# EAGLE board elysium_v0_4 (EAGLE 6.5.0)
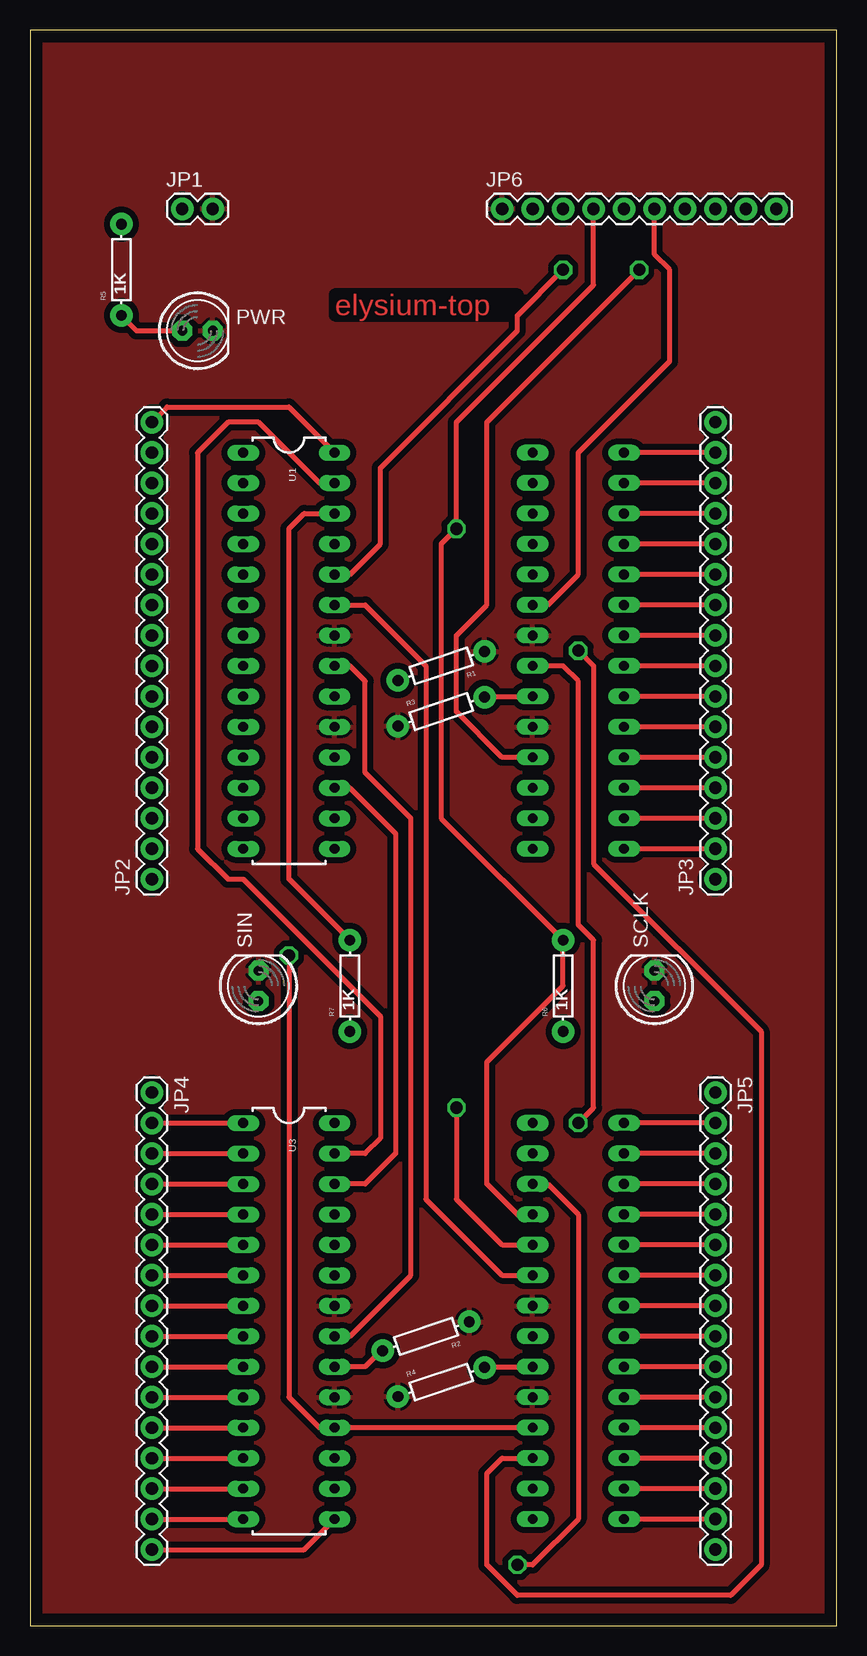
[diagram p0: board, top side]
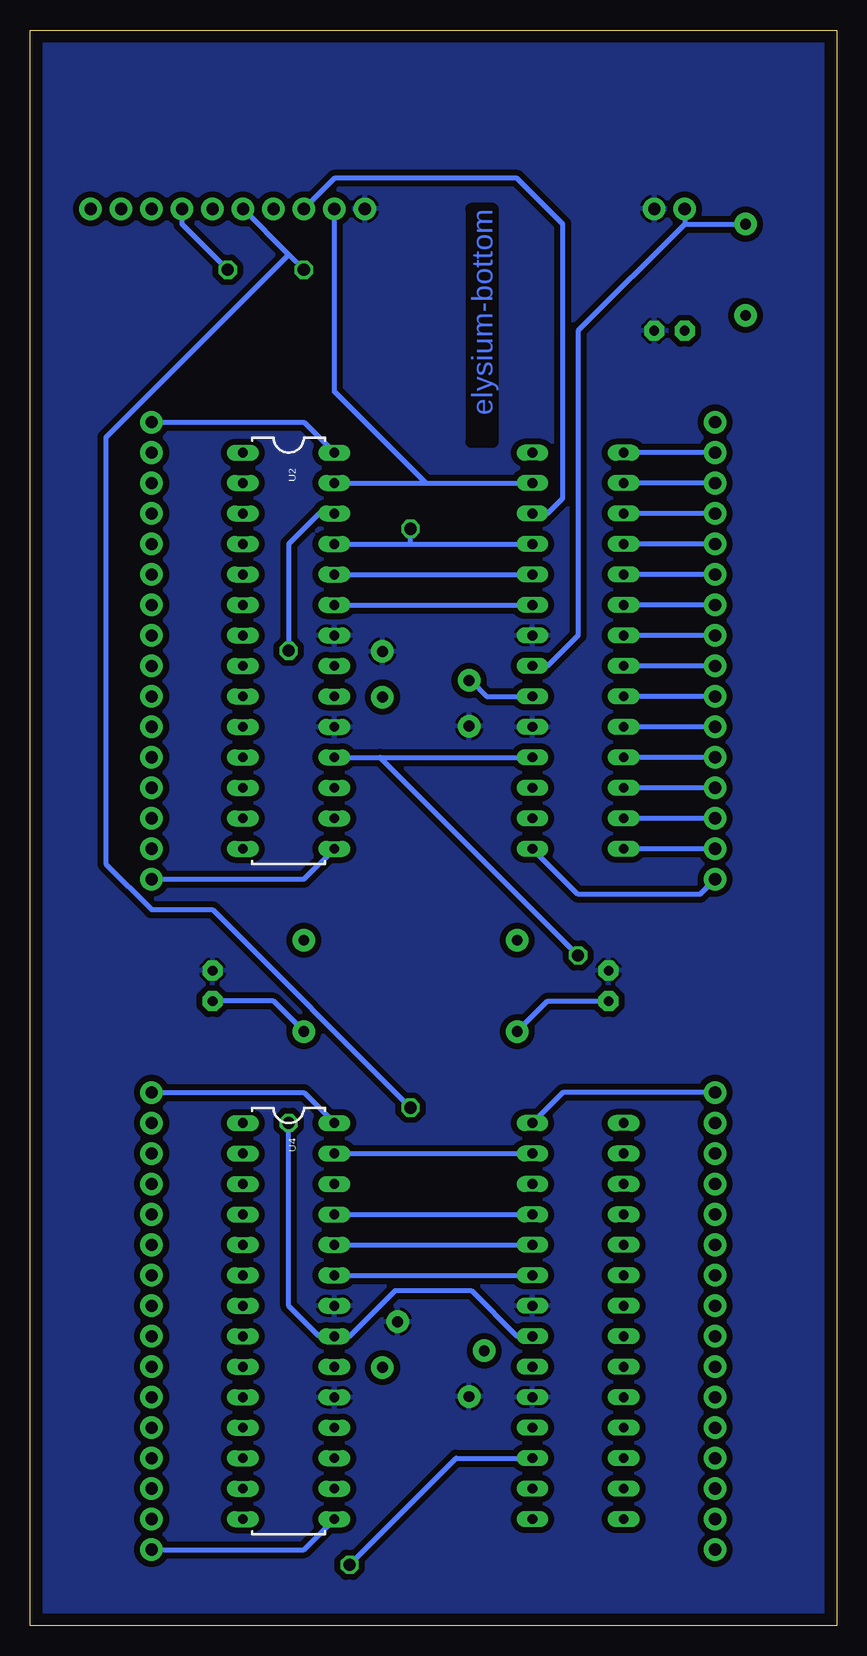
[diagram p1: board, bottom side, seen from below]

Size 67.29 x 133.02 mm. Coordinates in mm from the lower left corner, seen from the top.
Outline: 0,0 67.29,0 67.29,133.02 0,133.02 0,0
Copper layers (1*16): Top 0.035mm / dielectric 1.5mm / Bottom 0.035mm
Design rules "default *": minimum track width 16mil, minimum drill 20mil, track to track 20mil, track to pad 20mil, pad to pad 20mil, via to via 20mil, smd to smd 8mil, copper to edge 40mil, drill to drill 8mil, minimum pad ring 10mil, minimum via ring 8mil, stop-mask expansion 10mil, vias tented up to drill 40mil, thermal gap 10mil

## Footprints (pad centres in the part's own frame; a part is rotated, then mirrored left to right if it is on the bottom)
1X02 = drill 1.016 pad 1.88: 1 0,0; 2 2.54,0
1X16 = drill 1.016 pad 1.88: 1 0,0; 2 2.54,0; 3 5.08,0; 4 7.62,0; 5 10.16,0; 6 12.7,0; 7 15.24,0; 8 17.78,0; 9 20.32,0; 10 22.86,0; 11 25.4,0; 12 27.94,0; 13 30.48,0; 14 33.02,0; 15 35.56,0; 16 38.1,0
1X10 = drill 1.016 pad 1.88: 1 0,0; 2 2.54,0; 3 5.08,0; 4 7.62,0; 5 10.16,0; 6 12.7,0; 7 15.24,0; 8 17.78,0; 9 20.32,0; 10 22.86,0
LED5MM = drill 0.813 pad 1.676 octagon: A -1.27,0; K 1.27,0
AXIAL-0.3EZ = drill 0.9 pad 1.88: P$1 -3.81,0; P$2 3.81,0
DIL28-3 = drill 0.813 long: 1 -16.51,-3.81; 2 -13.97,-3.81; 3 -11.43,-3.81; 4 -8.89,-3.81; 5 -6.35,-3.81; 6 -3.81,-3.81; 7 -1.27,-3.81; 8 1.27,-3.81; 9 3.81,-3.81; 10 6.35,-3.81; 11 8.89,-3.81; 12 11.43,-3.81; 13 13.97,-3.81; 14 16.51,-3.81; 15 16.51,3.81; 16 13.97,3.81; 17 11.43,3.81; 18 8.89,3.81; 19 6.35,3.81; 20 3.81,3.81; 21 1.27,3.81; 22 -1.27,3.81; 23 -3.81,3.81; 24 -6.35,3.81; 25 -8.89,3.81; 26 -11.43,3.81; 27 -13.97,3.81; 28 -16.51,3.81

## Placement (x,y rotation side)
JP1  M02PTH  [1X02]  12.7,118.11 0 top
JP2  M16PTH  [1X16]  10.16,62.23 90 top
JP3  M16PTH  [1X16]  57.15,62.23 90 top
JP4  M16PTH  [1X16]  10.16,44.45 270 top
JP5  M16PTH  [1X16]  57.15,44.45 270 top
JP6  M10"  [1X10]  39.37,118.11 0 top
PWR  [LED5MM]  13.97,107.95 0 top
R1  [AXIAL-0.3EZ]  34.29,80.01 198.5 top
R2  [AXIAL-0.3EZ]  33.02,24.13 198.5 top
R3  [AXIAL-0.3EZ]  34.29,76.2 18.5 top
R4  [AXIAL-0.3EZ]  34.29,20.32 18.5 top
R5  1K  [AXIAL-0.3EZ]  7.62,113.03 90 top
R6  1K  [AXIAL-0.3EZ]  44.45,53.34 90 top
R7  1K  [AXIAL-0.3EZ]  26.67,53.34 90 top
SCLK  [LED5MM]  52.07,53.34 90 top
SIN  [LED5MM]  19.05,53.34 90 top
U1  TLC5940-NT  [DIL28-3]  21.59,81.28 270 top
U2  TLC5940-NT  [DIL28-3]  45.72,81.28 270 bottom
U3  TLC5940-NT  [DIL28-3]  21.59,25.4 270 top
U4  TLC5940-NT  [DIL28-3]  45.72,25.4 270 bottom

## Library data of the parts
JP1-JP6 = SparkFun-Connectors
PWR SCLK SIN = adafruit
R1-R7 = SparkFun-Resistors
U1-U4 = SparkFun-DigitalIC

## Nets
BLANK: JP6.6 U1.23 U2.23 U3.23 U4.23
GND: JP1.2 JP6.1 PWR.K R1.P$1 R2.P$1 R3.P$1 R4.P$1 SCLK.K SIN.K U1.19 U1.22 U2.19 U2.22 U3.19 U3.22 U4.19 U4.22
GSCLK: JP6.7 U1.18 U2.18 U3.18 U4.18
N$1: JP2.16 U1.28
N$2: JP2.15 U1.1
N$3: JP2.14 U1.2
N$4: JP2.13 U1.3
N$5: JP2.12 U1.4
N$6: JP2.11 U1.5
N$7: JP2.10 U1.6
N$8: JP2.9 U1.7
N$9: JP2.8 U1.8
N$10: JP2.7 U1.9
N$11: JP2.6 U1.10
N$12: JP2.5 U1.11
N$13: JP2.4 U1.12
N$14: JP2.3 U1.13
N$15: JP2.2 U1.14
N$16: JP2.1 U1.15
N$17: JP4.1 U3.28
N$18: JP4.2 U3.1
N$19: JP4.3 U3.2
N$20: JP4.4 U3.3
N$21: JP4.5 U3.4
N$22: JP4.6 U3.5
N$23: JP4.7 U3.6
N$24: JP4.8 U3.7
N$25: JP4.9 U3.8
N$26: JP4.10 U3.9
N$27: JP4.11 U3.10
N$28: JP4.12 U3.11
N$29: JP4.13 U3.12
N$30: JP4.14 U3.13
N$31: JP4.15 U3.14
N$32: JP4.16 U3.15
N$33: JP3.16 U2.28
N$34: JP3.15 U2.1
N$35: JP3.14 U2.2
N$36: JP3.13 U2.3
N$37: JP3.12 U2.4
N$38: JP3.11 U2.5
N$39: JP3.10 U2.6
N$40: JP3.9 U2.7
N$41: JP3.8 U2.8
N$42: JP3.7 U2.9
N$43: JP3.6 U2.10
N$44: JP3.5 U2.11
N$45: JP3.4 U2.12
N$46: JP3.3 U2.13
N$47: JP3.2 U2.14
N$48: JP3.1 U2.15
N$49: JP5.1 U4.28
N$50: JP5.2 U4.1
N$51: JP5.3 U4.2
N$52: JP5.4 U4.3
N$53: JP5.5 U4.4
N$54: JP5.6 U4.5
N$55: JP5.7 U4.6
N$56: JP5.8 U4.7
N$57: JP5.9 U4.8
N$58: JP5.10 U4.9
N$59: JP5.11 U4.10
N$60: JP5.12 U4.11
N$61: JP5.13 U4.12
N$62: JP5.14 U4.13
N$63: JP5.15 U4.14
N$64: JP5.16 U4.15
N$65: U1.17 U3.26
N$66: U3.17 U4.26
N$67: U2.26 U4.17
N$68: R1.P$2 U1.20
N$69: PWR.A R5.P$1
N$70: R2.P$2 U3.20
N$71: JP6.8
N$72: JP6.9
N$73: JP6.10
N$74: R6.P$1 SCLK.A
N$75: R3.P$2 U2.20
N$76: R7.P$1 SIN.A
N$77: R4.P$2 U4.20
SCLK: JP6.4 R6.P$2 U1.25 U2.25 U3.25 U4.25
SIN: JP6.3 R7.P$2 U1.26
VCC: JP1.1 R5.P$2 U1.21 U2.21 U3.21 U4.21
VPRG: JP6.2 U1.27 U2.27 U3.27 U4.27
XLAT: JP6.5 U1.24 U2.24 U3.24 U4.24

## Tracks (layer width: path | path; a pad name or v marks a point on that pad's centre or on a via)
BLANK
  Top 0.406: JP6.6 52.07,114.3 53.34,113.03 53.34,105.41 45.72,97.79 45.72,87.63 43.18,85.09 U2.23 | U4.23 39.37,29.21 33.02,35.56 33.02,80.01 27.94,85.09 U1.23
  Bottom 0.406: U4.23 U3.23 | U2.23 U1.23
GND
  pour Bottom: -5.08,135.89 -5.08,-2.54 69.85,-2.54 71.12,-2.54 71.12,135.89
  pour Top: -2.54,134.62 -2.54,-2.54 71.12,-2.54 71.12,-1.27 71.12,134.62
GSCLK  (via drill 1.02)
  Top 0.406: U4.18 U3.18 24.13,16.51 21.59,19.05 v21.59,55.88 | v50.8,113.03 38.1,100.33 38.1,85.09 35.56,82.55 35.56,76.2 39.37,72.39 U2.18
  Bottom 0.406: U2.18 38.1,72.39 | 38.1,72.39 U1.18 | JP6.7 54.61,116.84 v50.8,113.03 | 38.1,72.39 v21.59,55.88
N$1
  Top 0.406: U1.28 21.59,101.6 11.43,101.6 JP2.16
N$2
  Bottom 0.406: JP2.15 U1.1
N$3
  Bottom 0.406: JP2.14 U1.2
N$4
  Bottom 0.406: JP2.13 U1.3
N$5
  Bottom 0.406: JP2.12 U1.4
N$6
  Bottom 0.406: JP2.11 U1.5
N$7
  Bottom 0.406: JP2.10 U1.6
N$8
  Bottom 0.406: JP2.9 U1.7
N$9
  Bottom 0.406: JP2.8 U1.8
N$10
  Bottom 0.406: JP2.7 U1.9
N$11
  Bottom 0.406: JP2.6 U1.10
N$12
  Bottom 0.406: JP2.5 U1.11
N$13
  Bottom 0.406: JP2.4 U1.12
N$14
  Bottom 0.406: JP2.3 U1.13
N$15
  Bottom 0.406: JP2.2 U1.14
N$16
  Bottom 0.406: U1.15 21.59,60.96 11.43,60.96 JP2.1
N$17
  Bottom 0.406: U3.28 22.86,44.45 JP4.1
N$18
  Top 0.406: JP4.2 U3.1
N$19
  Top 0.406: JP4.3 U3.2
N$20
  Top 0.406: JP4.4 U3.3
N$21
  Top 0.406: JP4.5 U3.4
N$22
  Top 0.406: JP4.6 U3.5
N$23
  Top 0.406: JP4.7 U3.6
N$24
  Top 0.406: JP4.8 U3.7
N$25
  Top 0.406: JP4.9 U3.8
N$26
  Top 0.406: JP4.10 U3.9
N$27
  Top 0.406: JP4.11 U3.10
N$28
  Top 0.406: JP4.12 U3.11
N$29
  Top 0.406: JP4.13 U3.12
N$30
  Top 0.406: JP4.14 U3.13
N$31
  Top 0.406: JP4.15 U3.14
N$32
  Top 0.406: U3.15 22.86,6.35 JP4.16
N$33
  Bottom 0.406: U2.28 44.45,100.33 JP3.16
N$34
  Top 0.406: JP3.15 U2.1
N$35
  Top 0.406: JP3.14 U2.2
N$36
  Top 0.406: JP3.13 U2.3
N$37
  Top 0.406: JP3.12 U2.4
N$38
  Top 0.406: JP3.11 U2.5
N$39
  Top 0.406: JP3.10 U2.6
N$40
  Top 0.406: JP3.9 U2.7
N$41
  Top 0.406: JP3.8 U2.8
N$42
  Top 0.406: JP3.7 U2.9
N$43
  Top 0.406: JP3.6 U2.10
N$44
  Top 0.406: JP3.5 U2.11
N$45
  Top 0.406: JP3.4 U2.12
N$46
  Top 0.406: JP3.3 U2.13
N$47
  Top 0.406: JP3.2 U2.14
N$48
  Bottom 0.406: U2.15 44.45,62.23 JP3.1
N$49
  Bottom 0.406: U4.28 44.45,44.45 JP5.1
N$50
  Top 0.406: JP5.2 U4.1
N$51
  Top 0.406: JP5.3 U4.2
N$52
  Top 0.406: JP5.4 U4.3
N$53
  Top 0.406: JP5.5 U4.4
N$54
  Top 0.406: JP5.6 U4.5
N$55
  Top 0.406: JP5.7 U4.6
N$56
  Top 0.406: JP5.8 U4.7
N$57
  Top 0.406: JP5.9 U4.8
N$58
  Top 0.406: JP5.10 U4.9
N$59
  Top 0.406: JP5.11 U4.10
N$60
  Top 0.406: JP5.12 U4.11
N$61
  Top 0.406: JP5.13 U4.12
N$62
  Top 0.406: JP5.14 U4.13
N$63
  Top 0.406: JP5.15 U4.14
N$64
  Bottom 0.406: U4.15 44.45,6.35 JP5.16
N$65
  Top 0.406: U3.26 27.94,36.83 30.48,39.37 30.48,66.04 26.67,69.85 U1.17
N$66  (via drill 1.02)
  Top 0.406: v40.64,5.08 41.91,5.08 45.72,8.89 45.72,34.29 43.18,36.83 U4.26
  Bottom 0.406: U3.17 31.75,13.97 v40.64,5.08
N$67  (via drill 1.02)
  Top 0.406: U4.17 39.37,13.97 38.1,12.7 38.1,5.08 40.64,2.54 58.42,2.54 60.96,5.08 60.96,49.53 46.99,63.5 46.99,80.01 v45.72,81.28
  Bottom 0.406: v45.72,81.28 45.72,90.17 43.18,92.71 U2.26
N$68
  Bottom 0.406: U1.20 29.21,77.47 30.48,78.74 R1.P$2
N$69
  Top 0.406: PWR.A 8.89,107.95 R5.P$1
N$70
  Top 0.406: U3.20 27.94,21.59 29.21,22.86 R2.P$2
N$74
  Bottom 0.406: SCLK.A 46.99,52.07 R6.P$1
N$75
  Top 0.406: U2.20 38.1,77.47 R3.P$2
N$76
  Bottom 0.406: SIN.A 24.13,52.07 R7.P$1
N$77
  Top 0.406: U4.20 38.1,21.59 R4.P$2
SCLK  (via drill 1.02)
  Top 0.406: U4.25 40.64,34.29 38.1,36.83 38.1,46.99 44.45,53.34 R6.P$2 34.29,67.31 34.29,90.17 v35.56,91.44 35.56,100.33 46.99,111.76 JP6.4
  Bottom 0.406: U4.25 U3.25 | U2.25 35.56,90.17 | 35.56,90.17 U1.25 | 35.56,90.17 v35.56,91.44
SIN
  Top 0.406: U1.26 22.86,92.71 21.59,91.44 21.59,62.23 R7.P$2
  Bottom 0.406: JP6.3 41.91,120.65 26.67,120.65 22.86,116.84 22.86,93.98 24.13,92.71 U1.26
VCC  (via drill 1.02)
  Top 0.406: U2.21 44.45,80.01 45.72,78.74 45.72,58.42 46.99,57.15 46.99,43.18 v45.72,41.91 | U1.21 26.67,80.01 27.94,78.74 27.94,71.12 31.75,67.31 31.75,29.21 26.67,24.13 U3.21
  Bottom 0.406: U1.21 24.13,80.01 21.59,82.55 21.59,107.95 12.7,116.84 | JP1.1 12.7,116.84 | 12.7,116.84 R5.P$2 | U3.21 26.67,24.13 30.48,27.94 36.83,27.94 40.64,24.13 U4.21 43.18,24.13 45.72,26.67 v45.72,41.91
VPRG
  Top 0.406: U3.27 27.94,39.37 29.21,40.64 29.21,50.8 17.78,62.23 16.51,62.23 13.97,64.77 13.97,97.79 16.51,100.33 19.05,100.33 24.13,95.25 U1.27
  Bottom 0.406: U4.27 U3.27 | U2.27 34.29,95.25 | 34.29,95.25 U1.27 | JP6.2 41.91,102.87 34.29,95.25
XLAT  (via drill 1.02)
  Top 0.406: v44.45,113.03 40.64,109.22 40.64,107.95 29.21,96.52 29.21,90.17 26.67,87.63 U1.24 | U4.24 39.37,31.75 35.56,35.56 v35.56,43.18
  Bottom 0.406: U4.24 U3.24 | U2.24 U1.24 | v44.45,113.03 45.72,114.3 | 45.72,114.3 JP6.5 | v35.56,43.18 52.07,59.69 57.15,59.69 60.96,63.5 60.96,99.06 45.72,114.3

## Text on the board
Top: elysium-top
Bottom: elysium-bottom